# EAGLE board schematic_v1 (EAGLE 9.1.3)
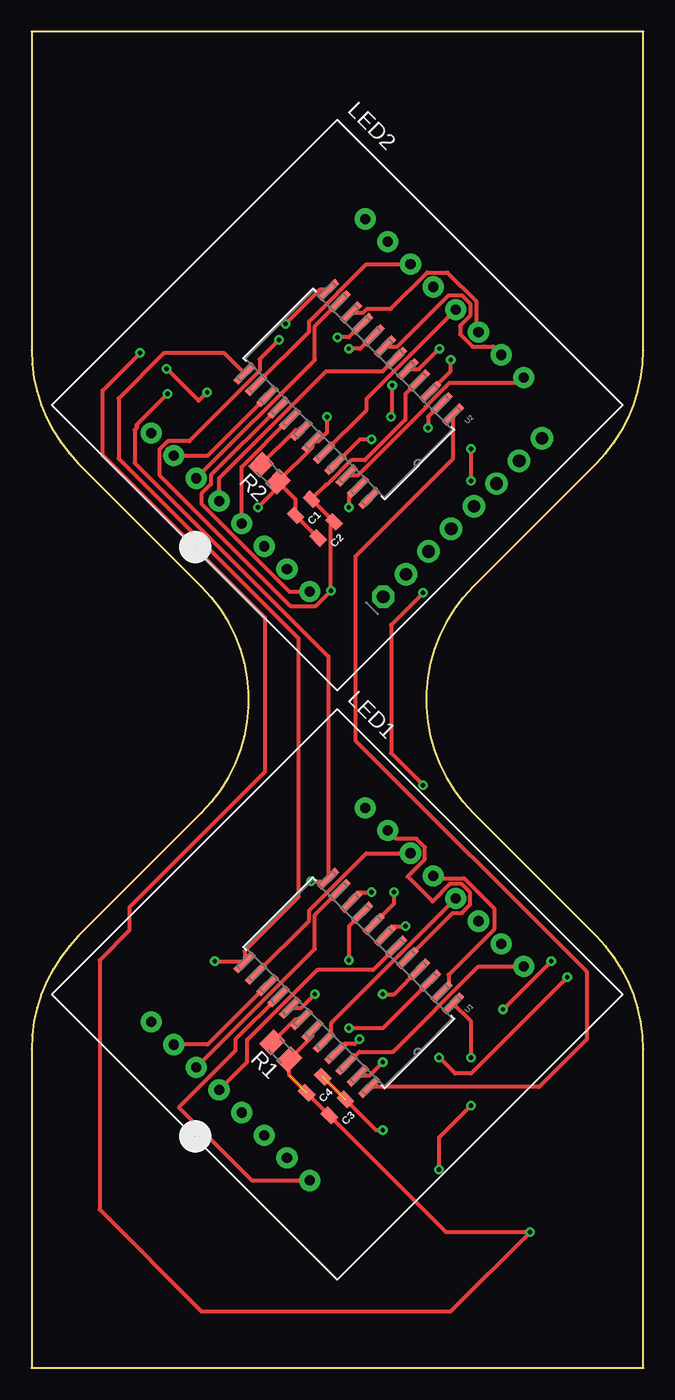
[diagram p0: board, top side]
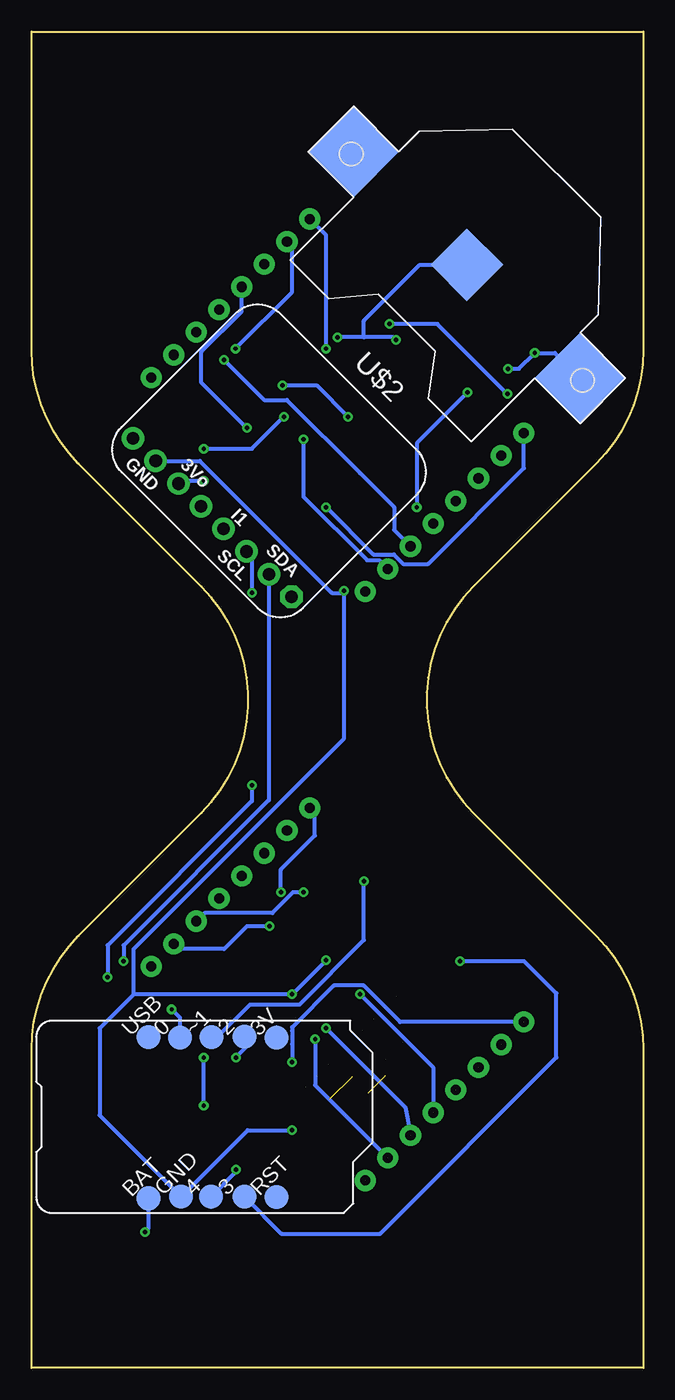
[diagram p1: board, bottom side, seen from below]

Size 48.49 x 105.97 mm. Coordinates in mm from the lower left corner, seen from the top.
Outline: 0,105.97 0,80.69 arc45 3.72,71.71 13.47,61.96 arc-90 13.47,44 3.72,34.25 arc45 0,25.27 0,0 48.49,0 48.49,25.27 arc45 44.77,34.25 35.02,44 arc-90 35.02,61.96 44.77,71.71 arc45 48.49,80.69 48.49,105.97 0,105.97
Copper layers (1*16): Top 0.035mm / dielectric 1.5mm / Bottom 0.035mm
Design rules "default": minimum track width 6mil, minimum drill 0.35mm, track to track 6mil, track to pad 6mil, pad to pad 6mil, via to via 6mil, smd to smd 6mil, copper to edge 40mil, drill to drill 6mil, minimum pad ring 10mil, minimum via ring 8mil, stop-mask expansion 4mil, vias tented up to drill 0mil, thermal gap 10mil

## Footprints (pad centres in the part's own frame; a part is rotated, then mirrored left to right if it is on the bottom)
TP19R = smd 1.9 x 1.9: TP 0,0
0805 = smd 0.8 x 1.2: 1 -0.9,0; 2 0.9,0
1X08_ROUND_70 = drill 1 pad 1.778 octagon: 1 -8.89,0 | drill 1 pad 1.778: 2 -6.35,0; 3 -3.81,0; 4 -1.27,0; 5 1.27,0; 6 3.81,0; 7 6.35,0; 8 8.89,0
SEGMENT_BL-M12A881UR = drill 0.8 pad 1.676: 1 -8.89,-12; 2 -6.35,-12; 3 -3.81,-12; 4 -1.27,-12; 5 1.27,-12; 6 3.81,-12; 7 6.35,-12; 8 8.89,-12; 9 8.89,12; 10 6.35,12; 11 3.81,12; 12 1.27,12; 13 -1.27,12; 14 -3.81,12; 15 -6.35,12; 16 -8.89,12
M0805 = smd 1.3 x 1.6: 1 -0.95,0; 2 0.95,0
21-0042B_24 = smd 1.981 x 0.533: 1 -4.686,6.985; 2 -4.686,5.715; 3 -4.686,4.445; 4 -4.686,3.175; 5 -4.686,1.905; 6 -4.686,0.635; 7 -4.686,-0.635; 8 -4.686,-1.905; 9 -4.686,-3.175; 10 -4.686,-4.445; 11 -4.686,-5.715; 12 -4.686,-6.985; 13 4.686,-6.985; 14 4.686,-5.715; 15 4.686,-4.445; 16 4.686,-3.175; 17 4.686,-1.905; 18 4.686,-0.635; 19 4.686,0.635; 20 4.686,1.905; 21 4.686,3.175; 22 4.686,4.445; 23 4.686,5.715; 24 4.686,6.985
CR2032-SMD = smd 5.08 x 5.08: +$1 -12.7,0; +$2 12.7,0 | smd 4.064 x 4.064: - 0,0

## Placement (x,y rotation side)
0  TPSQTP19R  [TP19R]  36.73,26.2 45 bottom
2  TPSQTP19R  [TP19R]  31.63,26.28 45 bottom
3  TPSQTP19R  [TP19R]  31.61,13.58 45 bottom
3V  TPSQTP19R  [TP19R]  29.08,26.2 45 bottom
4  TPSQTP19R  [TP19R]  34.27,13.58 45 bottom
BAT  TPSQTP19R  [TP19R]  39.21,13.45 45 bottom
C1  10uF  [0805]  21.55,68.25 225 top
C2  10uF  [0805]  23.35,66.45 225 top
C3  10uF  [0805]  24.25,20.65 225 top
C4  10uF  [0805]  22.45,22.45 225 top
GND  TPSQTP19R  [TP19R]  36.64,13.58 45 bottom
JP1  [1X08_ROUND_70]  34.16,67.43 45 top
LED1  [SEGMENT_BL-M12A881UR]  24.25,29.63 315 top
LED2  [SEGMENT_BL-M12A881UR]  24.25,76.33 315 top
R1  103  [M0805]  19.76,25.14 135 top
R2  103  [M0805]  18.86,70.94 135 top
RST  TPSQTP19R  [TP19R]  29.06,13.54 45 bottom
U1  MAX7219CWGT  [21-0042B_24]  25.14,30.53 225 top
U2  MAX7219CWGT  [21-0042B_24]  25.14,77.23 225 top
U$2  [CR2032-SMD]  13.99,87.46 135 bottom
USB  TPSQTP19R  [TP19R]  39.23,26.22 45 bottom
~1  TPSQTP19R  [TP19R]  34.21,26.24 45 bottom

## Library data of the parts
0 2 3 3V 4 BAT GND RST USB ~1 = testpad
C1-C4 = SparkFun-Capacitors; PROD_ID: CAP-11330
JP1 = microbuilder
LED1 LED2 R1 R2 U$2 = adafruit
U1 U2 = MAX7219CWGT; MANUFACTURER_PART_NUMBER: max7219cwg+t; VENDOR: MAXIM

## Nets
CLK: 3.TP U1.13 U2.13
DIN: 4.TP U1.1
GND: C1.1 C2.1 C3.1 C4.1 GND.TP JP1.7 U1.4 U1.9 U2.4 U2.9 U$2.-
INT1: JP1.4
INT2: JP1.5
LOAD: U1.12 U2.12 ~1.TP
N$1: R2.2 U2.18
N$2: LED1.13 U1.2
N$3: LED1.6 U1.3
N$5: LED1.15 U1.5
N$6: LED1.4 U1.6
N$7: LED1.10 U1.7
N$8: LED1.16 U1.8
N$9: LED2.13 U2.2
N$10: LED1.11 U1.10
N$11: LED1.3 U1.11
N$12: LED2.6 U2.3
N$13: LED1.9 U1.22
N$14: LED1.14 U1.14
N$15: LED1.8 U1.16
N$16: LED1.12 U1.20
N$17: LED1.1 U1.23
N$18: LED1.7 U1.21
N$19: LED1.2 U1.15
N$20: LED1.5 U1.17
N$21: U1.24 U2.1
N$22: LED2.15 U2.5
N$24: LED2.4 U2.6
N$25: LED2.10 U2.7
N$26: LED2.16 U2.8
N$27: LED2.11 U2.10
N$28: LED2.3 U2.11
N$29: LED2.9 U2.22
N$30: LED2.14 U2.14
N$31: LED2.8 U2.16
N$32: LED2.12 U2.20
N$33: LED2.1 U2.23
N$34: LED2.7 U2.21
N$35: LED2.2 U2.15
N$36: LED2.5 U2.17
N$37: U2.24
N$38: R1.2 U1.18
SA0: JP1.1
SCL: 2.TP JP1.3
SDA: 0.TP JP1.2
VCC: BAT.TP C1.2 C2.2 C3.2 C4.2 JP1.6 R1.1 R2.1 U1.19 U2.19 U$2.+$1

## Tracks (layer width: path | path; a pad name or v marks a point on that pad's centre or on a via)
CLK  (via drill 0.35)
  Top 0.305: U2.13 15.29,80.45 10.49,80.45 6.9,76.86 6.9,72.12 21.16,57.87 21.16,37.32 16.89,33.06 U1.13 16.81,32.24 v14.52,32.24
  Bottom 0.305: 3.TP 28.69,10.65 20.87,10.65 6.9,24.62 6.9,29.7 9.44,32.24 v14.52,32.24
DIN  (via drill 0.35)
  Top 0.305: v32.3,15.73 32.3,18.27 v34.84,20.81 | v34.84,24.62 34.84,27.46 U1.1
  Bottom 0.305: 4.TP 32.3,15.54 v32.3,15.73 | v34.84,20.81 v34.84,24.62
GND  (via drill 0.35)  (2 unrouted)
  Top 0.305: U2.9 25.14,81.72 v24.25,81.72 | U2.4 29.63,77.23 29.63,75.18 26.42,71.97 25.36,71.97 23.44,70.05 23.35,70.05 C1.1 C2.1 23.72,66.83 v23.72,61.62 22.52,60.42 20.52,60.42 10.13,70.81 10.13,72.81 10.8,73.48 12.5,73.48 18.09,79.06 18.09,79.99 v19.6,81.5 | U1.9 25.14,35.02 v25.14,32.33 | v27.84,29.64 28.74,29.64 U1.4 | v27.84,18.86 27.32,18.86 C4.1
  Bottom 0.305: v19.6,81.5 19.82,81.72 22.14,81.72 | 22.14,81.72 v24.25,81.72 | v25.14,32.33 v27.84,29.64 40.41,29.64 | 40.41,29.64 43.11,26.94 43.11,20.04 GND.TP 31.36,18.86 v27.84,18.86 | 40.41,29.64 40.41,33.23 23.72,49.91 23.72,61.45 | 23.72,61.45 v23.72,61.62 | JP1.7 35.15,71.92 24.68,61.45 23.72,61.45 | 22.14,81.72 22.14,83.04 17.72,87.46 U$2.-
LOAD  (via drill 0.35)
  Top 0.305: 8.33,74.61 8.33,74.54 | 8.33,74.54 8.17,74.38 8.17,71.76 23.52,56.42 U1.12 23.33,38.59 v22.14,38.59 | U2.12 22.84,85.48 v20.13,82.77 | v10.78,77.23 8.33,74.79 8.33,74.54
  Bottom 0.305: v22.14,38.59 22.14,33.93 27.25,28.83 31.17,28.83 33.76,26.24 ~1.TP | v10.78,77.23 16.32,82.77 v20.13,82.77
N$1
  Top 0.305: R2.2 20.94,74.37 U2.18
N$2
  Top 0.305: LED1.13 32.03,38.82 34.29,38.82 36.67,36.44 36.67,34.79 33.06,31.17 33.06,30.36 U1.2
N$3  (via drill 0.35)  (1 unrouted)
  Top 0.305: U1.3 27.84,26.94 v25.14,26.94
  Bottom 0.305: v25.14,26.94 18.86,20.65 LED1.6
N$5
  Top 0.305: LED1.15 28.89,41.96 30.51,41.96 31.18,41.29 31.18,40.34 29.81,38.97 31.78,36.99 33.16,38.37 34.1,38.37 34.77,37.7 34.77,36.75 34.1,36.08 33.39,36.08 U1.5
N$6  (1 unrouted)
  Top 0.305: U1.6 27.07,31.56 22.67,31.56 17.15,26.04 17.06,26.04 17.06,24.25 LED1.4
N$7  (via drill 0.35)
  Top 0.305: U1.7 28.74,35.02 v29.63,35.02
  Bottom 0.305: v29.63,35.02 31.43,35.02 33.23,33.23 36.82,33.23 LED1.10
N$8  (via drill 0.35)
  Top 0.305: U1.8 28.74,36.82 v28.74,37.72
  Bottom 0.305: v28.74,37.72 28.74,39.51 26.04,42.21 26.04,44 LED1.16
N$9  (via drill 0.35)
  Top 0.305: U2.2 31.43,75.43 v31.43,74.54
  Bottom 0.305: LED2.13 31.83,83.76 35.02,80.57 35.02,78.13 v31.43,74.54
N$10  (via drill 0.35)
  Top 0.305: U1.10 26.04,37.72 v26.94,37.72
  Bottom 0.305: v26.94,37.72 27.77,37.72 29.41,36.08 34.77,36.08 LED1.11
N$11  (1 unrouted)
  Top 0.305: LED1.3 22.45,33.23 22.45,35.92 U1.11
N$12  (via drill 0.35)
  Top 0.305: U2.3 33.23,79.03 v33.23,79.92
  Bottom 0.305: v33.23,79.92 30.05,76.75 28.25,76.75 22.45,70.94 19.76,68.25 19.76,66.45 LED2.6
N$13  (1 unrouted)
  Top 0.305: U1.22 25.98,25.08 28.66,25.08 35.41,31.83 LED1.9
N$14
  Top 0.305: U1.14 21.99,35.46 21.99,36.27 26.54,40.81 LED1.14
N$15  (2 unrouted)
  Top 0.305: U1.16 16.16,26.04 16.16,25.15 11.67,20.65 17.47,14.86 LED1.8
N$16
  Top 0.305: LED1.12 23.76,27.35 23.76,26.51 23.18,25.92 U1.20
N$17  (via drill 0.35)  (2 unrouted)
  Top 0.305: v27.84,24.25 26.77,23.18 U1.23
  Bottom 0.305: LED1.1 19.29,27.44 22.17,30.32 24.53,30.32 27.84,27.01 27.84,26.74 27.82,26.72 27.82,25.68 27.84,25.67 v27.84,24.25
N$18  (via drill 0.35)  (1 unrouted)
  Top 0.305: v26.01,26.08 25.62,25.69 24.86,25.69 24.79,25.69 U1.21
  Bottom 0.305: v26.01,26.08 26.01,22.42 LED1.7
N$19  (1 unrouted)
  Top 0.305: U1.15 13.97,25.64 LED1.2
N$20  (via drill 0.35)  (2 unrouted)
  Top 0.305: U1.17 21.38,28.57 v22.45,29.64
  Bottom 0.305: v22.45,29.64 16.66,23.84 LED1.5
N$21  (1 unrouted)
  Top 0.305: U2.1 33.4,72.08 25.67,64.35 25.67,49.76 44,31.43 44,26.04 40.24,22.28 U1.24
N$22  (via drill 0.35)
  Top 0.305: U2.5 30.7,79.2 v32.33,80.82
  Bottom 0.305: v32.33,80.82 27.84,85.31 27.84,88.9 LED2.15
N$24
  Top 0.305: LED2.4 14.86,70.54 23.35,79.03 27.84,79.03 U2.6
N$25
  Top 0.305: LED2.10 36.56,80.99 35.91,80.99 35.9,80.98 34.95,80.98 33.97,81.96 33.97,82.64 34.77,83.45 34.77,84.39 34.1,85.06 33.07,85.06 29,80.99 U2.7
N$26  (via drill 0.35)
  Top 0.305: U2.8 26.04,80.82 v25.14,80.82
  Bottom 0.305: v25.14,80.82 25.14,89.8 LED2.16
N$27
  Top 0.305: U2.10 26.3,83.69 26.6,83.98 28.48,83.98 31.36,86.86 32.95,86.86 35.23,84.58 35.23,82.32 LED2.11
N$28
  Top 0.305: LED2.3 22.45,79.92 22.45,82.62 U2.11
N$29
  Top 0.305: U2.22 25.87,70.77 31.39,76.29 31.39,76.38 | 31.22,76.21 31.39,76.38 | 31.39,76.38 33.14,78.13 38.62,78.13 LED2.9
N$30
  Top 0.305: U2.14 21.99,82.16 21.99,82.97 26.54,87.51 LED2.14
N$31
  Top 0.305: U2.16 14.21,70.79 14.21,70.07 13.47,69.33 13.47,68.52 20.43,61.56 LED2.8
N$32
  Top 0.305: U2.20 26.57,75.96 26.57,76.86 LED2.12
N$33  (via drill 0.35)
  Top 0.305: U2.23 25.14,69.15 v25.14,68.25
  Bottom 0.305: v25.14,68.25 21.39,64.5 19.78,64.5 19.04,63.76 17.06,63.76 9.48,71.35 LED2.1
N$34  (via drill 0.35)
  Top 0.305: U2.21 26.04,73.64 v26.94,73.64
  Bottom 0.305: LED2.7 20.94,64.04 21.9,64.04 26.94,69.08 v26.94,73.64
N$35
  Top 0.305: LED2.2 13.97,72.34 U2.15
N$36
  Top 0.305: LED2.5 16.66,71.44 U2.17
N$38  (2 unrouted)
  Top 0.305: R1.2 20.94,27.67 U1.18
SCL  (via drill 0.35)
  Top 0.305: v31.03,61.45 28.49,58.91 28.49,48.75 v31.03,46.21 | v42.46,30.97 34.84,23.35 33.57,23.35 v32.3,24.62
  Bottom 0.305: JP1.3 31.03,64.3 v31.03,61.45 | v31.03,61.45 | v31.03,46.21 31.03,44.94 42.46,33.51 v42.46,30.97 | v32.3,24.62 31.03,25.89 31.42,26.28 2.TP
SDA  (via drill 0.35)
  Top 0.305: v41.19,32.24 v37.38,28.43
  Bottom 0.305: JP1.2 29.67,45.03 41.19,33.51 v41.19,32.24 | v37.38,28.43 36.73,27.78 0.TP
VCC  (via drill 0.35)  (4 unrouted)
  Top 0.254: 36.81,70.08 JP1.6
  Top 0.305: R2.1 22.28,73.02 U2.19 22.73,73.47 23.41,74.15 v23.41,75.42 | R2.1 20.92,68.89 C1.2 C2.2 | v17.96,68.25 19.53,69.82 R2.1 | U1.19 22.28,26.32 R1.1 20.43,23.2 C3.2 32.85,10.78 v39.51,10.78 33.23,4.49 13.47,4.49 5.39,12.57 5.39,32.33 7.76,34.7 7.76,36.53 18.49,47.26 18.49,59.52 5.63,72.37 5.63,77.51 v8.61,80.48 | v10.71,79.23 13.25,76.69 | 13.25,76.69 | 13.25,76.69 v13.92,77.37 | v34.84,70.34 v34.84,72.88 | v28.49,75.42 28.59,75.52 v28.59,77.91 | v8.61,80.48
  Bottom 0.305: v13.92,77.37 17.96,73.33 v17.96,68.25 | v39.51,10.78 39.21,11.08 BAT.TP | JP1.6 36.64,70.34 v34.84,70.34 | v34.84,72.88 31.03,72.88 v28.49,75.42 | v28.59,77.91 25.9,77.91 v23.41,75.42 | v10.71,79.23 9.86,79.23 v8.61,80.48 7.01,80.48 U$2.+$1

## Text on the board
bPlace: 3Vo | GND | I1 | SDA | SCL